# Altium PCB RADU-B00-V00.PcbDoc
Units mil, origin at the board's own origin, x right, y up, seen from the top; angles counter-clockwise.
Board outline 1062.99 x 455 mil, 2 copper layers (Top Layer, Bottom Layer), stack 61.8 mil thick; 8 components, 16 nets, 50 pads, 12 vias.
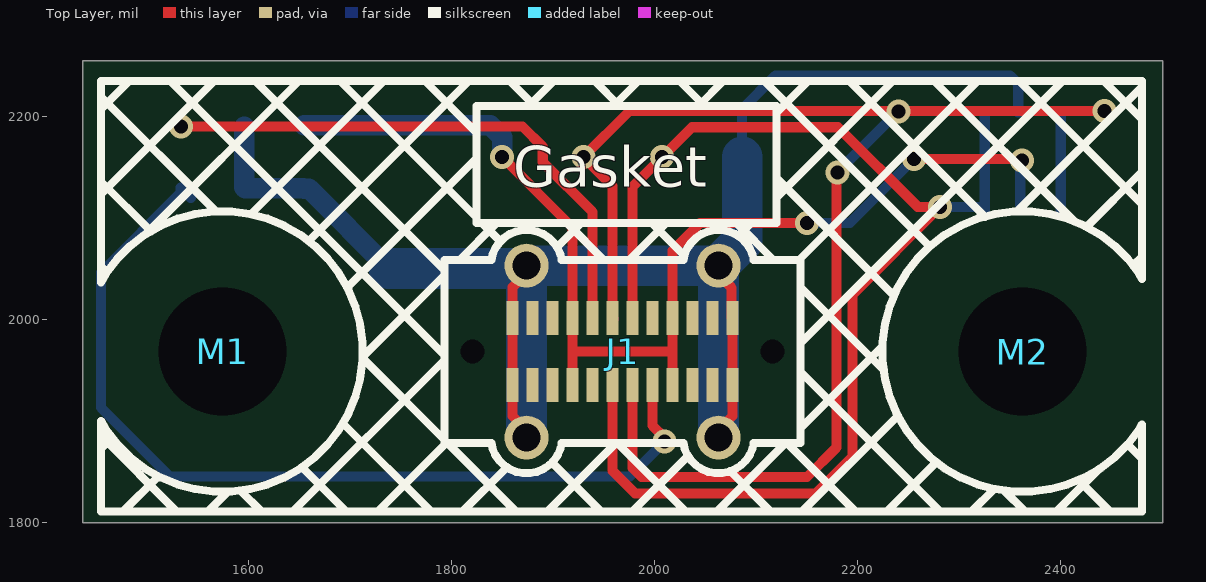
[diagram p0: Top Layer view]
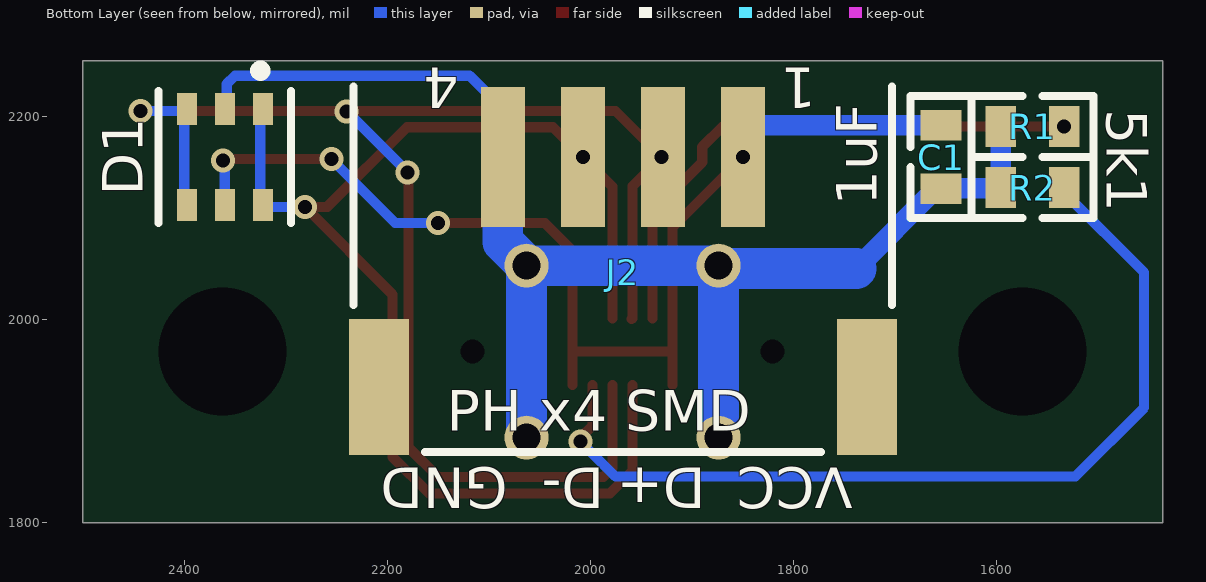
[diagram p1: Bottom Layer view, seen from below]
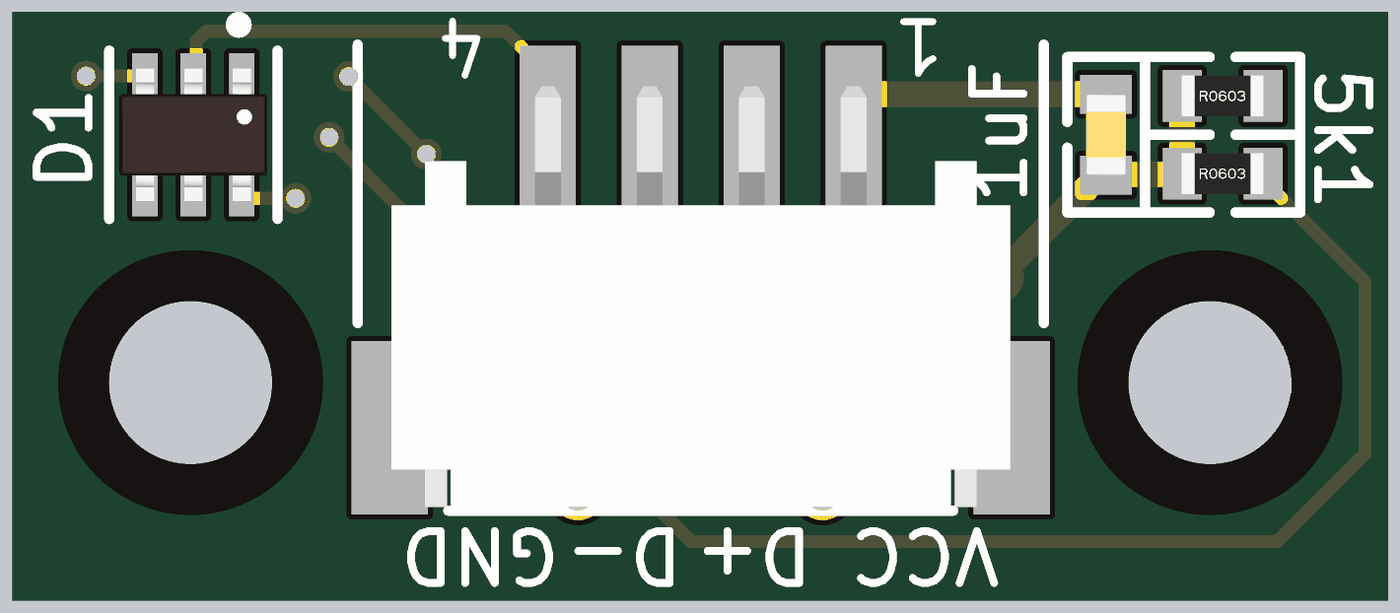
[diagram p2: 3D render of the assembled board from below, using the file's embedded part models]

## Layer stack, top to bottom
Top Solder: solder mask 0.4, Solder Resist, Dk 3.5
Top Layer: signal copper 1.4
Dielectric 1: core 59, Core-043, Dk 4.3
Bottom Layer: signal copper 1.4
Bottom Solder: solder mask 0.4, Solder Resist, Dk 3.5

## Board outline
1437.01,1800 2500,1800 2500,2255 1437.01,2255

## Design rules (kind name [scope] priority, off if disabled: settings)
Clearance [All] p1: gap=10 ignorepadtopadclearanceinfootprint=FALSE except(0: Arc-Hole Track-Hole SMDPad-Hole THPad-Hole Via-Hole Fill-Hole Poly-Hole Region-Hole Text-Hole; 6: Arc-Arc Arc-Track Arc-SMDPad Track-Track Track-SMDPad SMDPad-SMDPad)
PlaneConnect [All] p1: planeconnectstyle=Direct reliefexpansion=20 reliefentries=4 reliefconductorwidth=10 reliefairgap=10
PolygonConnect [All] p1: connectstyle=Direct reliefconductorwidth=10 reliefentries=4 polygonreliefangle="90 Angle" airgapwidth=10
RoutingVias [All] p1: holewidth=13.78 width=23.62 viastyle="Through Hole" minholewidth=13.78 minwidth=23.62 maxholewidth=13.78 maxwidth=23.62
SolderMaskExpansion [All] p1: expansion=4 istentingtop=FALSE
Width [All] p1: maxlimit=20 minlimit=6 preferedwidth=10 minimp=50.000000 maximp=50.000000 favimp=50.000000
29 further rules are at their usual default settings.

## Components (designator, comment, footprint, x,y, rotation, side; value= is the part's Value field where it differs from the comment)
C1 "1uF" Cap_Ceramic_0603 1655,2160 r90 bottom
D1 "PRTR5V0U4D" SC-47 2360,2160 r270 bottom
J1 "USB4115-03-C" USB4115-03-C 1968.5,1968.5 r0 top
J2 "JST PH 4x RIGHT SMD" "JST PH 4x RIGHT SMD" 1968.11,1874.57 r0 bottom
M1 "Hole M3 Tight Unplated" "M3.2 UNPLATED" 1574.8,1968.5 r0 top
M2 "Hole M3 Tight Unplated" "M3.2 UNPLATED" 2362.2,1968.5 r0 top
R1 "5k1 1%" Res_ThinFilm_0603 1565,2190 r180 bottom
R2 "5k1 1%" Res_ThinFilm_0603 1565,2130 r180 bottom

## Footprints (in the part's own frame and the unit in brackets; to place one, negate y for a bottom-side part, rotate by r counter-clockwise, add the part's x,y. Pads: shape width x height; smd on the part's side, far side on the other; paste and mask are expansions set on the pad)
Cap_Ceramic_0603 [mil]
  rect 30x40 smd: 1(-31.24,0) 2(31.24,0)
  silkscreen extent -60,-30 60,30, body extent -31,-16 31,16, height 33
"JST PH 4x RIGHT SMD" [mm]
  rect 1.1x3.5 smd: 1(-3,-7.25) 2(-1,-7.25) 3(1,-7.25) 4(3,-7.25)
  rect 1.5x3.4 smd: M(-6.1,-1.5) M(6.1,-1.5)
  silkscreen extent -6.73,-9.02 6.73,0.13, body extent -6.07,-8.2 6.07,0.06, height 5.38
"M3.2 UNPLATED" [mm]
  round 0 hole 3.2 unplated mask+2.6: 1(0,0)
  Top Layer pour cut-out: 0,-2.794 -1.069,-2.581 -1.976,-1.976 -2.581,-1.069 -2.794,0 -2.794,0 -2.581,1.069 -1.976,1.976 -1.069,2.581 0,2.794 0,2.794 1.069,2.581 1.976,1.976 2.581,1.069 2.794,0 2.794,0 2.581,-1.069 1.976,-1.976 1.069,-2.581 0,-2.794
  Bottom Layer pour cut-out: 0,-2.794 -1.069,-2.581 -1.976,-1.976 -2.581,-1.069 -2.794,0 -2.794,0 -2.581,1.069 -1.976,1.976 -1.069,2.581 0,2.794 0,2.794 1.069,2.581 1.976,1.976 2.581,1.069 2.794,0 2.794,0 2.581,-1.069 1.976,-1.976 1.069,-2.581 0,-2.794
Res_ThinFilm_0603 [mil]
  rect 30x40 smd: 1(-31.24,0) 2(31.24,0)
  silkscreen extent -60,-30 60,30, body extent -31,-16 31,16, height 18
SC-47 [mm]
  rect 0.8x0.5 smd: 1(-1.2,0.95) 2(-1.2,0) 3(-1.2,-0.95) 4(1.2,-0.95) 5(1.2,0) 6(1.2,0.95)
  silkscreen extent -2.29,-1.65 1.65,1.65, body extent -1.3,-1.45 1.3,1.45, height 1.14
USB4115-03-C [mm]
  rect 0.3x0.85 smd: A1(-2.75,0.835) A2(-2.25,0.835) A3(-1.75,0.835) A4(-1.25,0.835) A5(-0.75,0.835) A6(-0.25,0.835) A7(0.25,0.835) A8(0.75,0.835) A9(1.25,0.835) A10(1.75,0.835) A11(2.25,0.835) A12(2.75,0.835) B1(2.75,-0.835) B2(2.25,-0.835) B3(1.75,-0.835) B4(1.25,-0.835) B5(0.75,-0.835) B6(0.25,-0.835) B7(-0.25,-0.835) B8(-0.75,-0.835) B9(-1.25,-0.835) B10(-1.75,-0.835) B11(-2.25,-0.835) B12(-2.75,-0.835)
  round 0 hole 0.6 mask+0.102: M1(-3.75,0)
  rect 0x0 hole 0.6: M2(3.75,0)
  round 1.1 hole 0.7: S1(-2.4,2.15) S2(2.4,2.15) S3(-2.4,-2.15) S4(2.4,-2.15)
  silkscreen extent -4.44,-2.29 4.45,2.29, body extent -4.47,-2.31 4.47,2.29, height 9.35

## Part data
C1: library part "1uF 25V 5% X7R 0603", "Capacitor, Ceramic, SMD, 1uF, 25V, 5%, X7R, 0603"
D1: "Clamp Ipp Tvs Diode Surface Mount 6-TSOP"
J1: "USB-C (USB TYPE-C) USB 3.2 Gen 2 (USB 3.1 Gen 2, Superspeed + (USB 3.1)) Receptacle Connector 24 Position Surface Mount, Through Hole"
M1 M2: "M3.2 Hole, No Plating"
R1 R2: library part "5k1 1% 0603", "Resistor, SMD, 5k1, 0.1W, 1%, 0603"

## Via types
v1: diameter 23.62, hole 13.78, Top Layer to Bottom Layer, tented both sides, 11 vias
v2: diameter 23.62, hole 13.78, Top Layer to Bottom Layer, 1 vias

## Nets (pads, with @x,y where several pads share a name; then routed paths per layer and width w, separated by ;. In a path a pad name is that pad's centre, name@x,y a point inside that pad or via, vN(x,y) a via of type N, cw(c..) or ccw(c..) an arc to the next point about the centre after c; other vN are vias at no path point)
GND: C1.1 D1.2 J1.A1 J1.A12 J1.B1 J1.B12 J1.S1 J1.S2 J1.S3 J1.S4 J2.4 R1.1 R2.1 | length 1741.4
  Top Layer w10: J1.S3 1874.02,1891.32 1860.24,1905.1 J1.B12 J1.A1 1860.24,2031.91 1874.02,2045.69 J1.S1 ; J1.S4 2062.99,1891.32 2076.77,1905.1 J1.B1 J1.A12 2075.87,2002.28 2075.87,2031.26 2062.99,2044.14 J1.S2
  Bottom Layer w10: J2.4 2086.22,2207.24 2118.98,2240 2350,2240 2357.98,2232.02 D1.2@2357.98,2203.91
  Bottom Layer w20: R1.1 R2.1 1596.85,2129.38 1654.38,2129.38 C1.1 1660,2128.76 1738.5,2050.26
  Bottom Layer w40: 1738.5,2050.26 1870.23,2050.26 1873.12,2053.15 J1.S1 ; J1.S3 J1.S1 ; J1.S4 J1.S2 ; J2.4 2086.22,2076.38 J1.S2 ; J1.S1 J1.S2
"USB CC1": J1.A5 R1.2 | length 553.4
  Top Layer w10: v2(1533.76,2190) 1870,2190 1890,2170 1890,2155 1938.98,2106.02 J1.A5
"USB CC2": J1.B5 R2.2 | length 907.6
  Top Layer w10: J1.B5 1998.03,1895.65 2010,1883.69 v1(2010,1880)
  Bottom Layer w10: R2.2 1533.76,2125 1455.12,2046.36 1455.12,1913.37 1522.93,1845.56 1975.56,1845.56 v1(2010,1880) ; R2.2@1543.39,2119.62 R2.2@1543.76,2120
"USB D_N": D1.1 D1.6 J1.A7 J1.B7 J2.3 | length 1256.3
  Top Layer w10: J1.B7 1958.66,1851.08 1980.75,1829 2159,1829 2195,1865 2195,2024.86 v1(2281.07,2110.92) 2259.08,2110.92 2180.62,2189.38 2036.86,2189.38 v1(2007.48,2160) 1978.35,2130.87 J1.A7
  Bottom Layer w10: v1(2281.07,2110.92) 2319.08,2110.92 2325,2105 D1.1@2325,2199.49
"USB D_P": D1.3 D1.4 J1.A6 J1.B6 J2.2 | length 1499.9
  Top Layer w10: J1.A6@1959.57,2000.47 J1.A6 1958.66,2131.34 v1(1930,2160) 1975.38,2205.38 v1(2442.93,2205.38) ; J1.B6 1978.35,1854.03 1987.37,1845 2150,1845 2179,1874 2179,2144 v1(2180,2145)
  Bottom Layer w10: v1(2180,2145) v1(2240,2205) ; D1.4@2399.8,2105 2399.8,2202.94 2402.24,2205.38 v1(2442.93,2205.38)
"USB RX1_N": J1.B10
"USB RX1_P": J1.B11
"USB RX2_N": J1.A10
"USB RX2_P": J1.A11
"USB SBU1": J1.A8
"USB SBU2": J1.B8
"USB TX1_N": J1.A3
"USB TX1_P": J1.A2
"USB TX2_N": J1.B3
"USB TX2_P": J1.B2
VUSB: C1.2 D1.5 J1.A4 J1.A9 J1.B4 J1.B9 J2.1 | length 1129.4
  Top Layer w10: v1(1850,2160) 1919.29,2090.71 J1.A4 1919.29,1968.5 ; J1.B9 1919.29,1968.5 ; J1.B4 2017.72,1968.5 ; v1(2150,2095) 2045,2095 2017.72,2067.72 J1.A9 2017.72,1968.5 ; v1(2255.18,2158.03) 2360.27,2158.03 v1(2361.53,2156.77) ; 1919.29,1968.5 2017.72,1968.5
  Bottom Layer w10: v1(2150,2095) 2192.15,2095 v1(2255.18,2158.03) ; D1.5 2360,2155.24 v1(2361.53,2156.77)
  Bottom Layer w20: C1.2 1838.35,2191.24 1850,2179.58 v1(1850,2160)
pads on no net: J1.M1 J1.M2 J2.M M1.1 M2.1

## Polygon pours and split planes (outlines as drawn)
no net on Top Overlay (hatched 45Degree grid 59.06 track 7.87): 1455,1811.02 2480,1811.02 2480,2235 1455,2235

## Silkscreen, mask and mechanical layers (free items; w line width, h text height)
Top Overlay:
  pour cut-out: 1874.02,2018.15 cw(c1874.02,2053.15) 1839.02,2053.15 cw(c1874.02,2053.15) 1874.02,2088.15 cw(c1874.02,2053.15) 1909.02,2053.15 cw(c1874.02,2053.15)
  pour cut-out: 2062.99,2018.15 cw(c2062.99,2053.15) 2027.99,2053.15 cw(c2062.99,2053.15) 2062.99,2088.15 cw(c2062.99,2053.15) 2097.99,2053.15 cw(c2062.99,2053.15)
  pour cut-out: 2062.99,1848.86 cw(c2062.99,1883.86) 2027.99,1883.86 cw(c2062.99,1883.86) 2062.99,1918.86 cw(c2062.99,1883.86) 2097.99,1883.86 cw(c2062.99,1883.86)
  pour cut-out: 1874.02,1848.86 cw(c1874.02,1883.86) 1839.02,1883.86 cw(c1874.02,1883.86) 1874.02,1918.86 cw(c1874.02,1883.86) 1909.02,1883.86 cw(c1874.02,1883.86)
  pour cut-out: 1574.8,1830.71 cw(c1574.8,1968.5) 1437.01,1968.5 cw(c1574.8,1968.5) 1574.8,2106.3 cw(c1574.8,1968.5) 1712.6,1968.5 cw(c1574.8,1968.5)
  pour cut-out: 2362.2,1830.71 cw(c2362.2,1968.5) 2224.41,1968.5 cw(c2362.2,1968.5) 2362.2,2106.3 cw(c2362.2,1968.5) 2500,1968.5 cw(c2362.2,1968.5)
  pour cut-out: 1825,2095 2120,2095 2120,2210 1825,2210
  pour cut-out: 1793.5,2058.5 2143.5,2058.5 2143.5,1878.5 1793.5,1878.5
  text "Gasket" at 1861,2131 h40
Bottom Overlay:
  text "5k1" at 1491.74,2207.13 h40 r90
  text "1uF" at 1718.42,2111.88 h40 r270
  text "VCC" at 1741.68,1854 h40 r180
  text "D+" at 1886.68,1854 h40 r180
  text "D-" at 1986.68,1854 h40 r180
  text "GND" at 2081.68,1854 h40 r180
Mechanical 1:
  the board outline again, w10

## Text inside footprints (layer, text, board x,y; h text height)
J2: Bottom Overlay "4" at 2129.86,2248.06 h40 r180; Bottom Overlay "1" at 1777.72,2247.66 h40 r180; Bottom Overlay "PH x4 SMD" at 2141.39,1890.57 h40